# Altium PCB MZCAT_motherboard.PcbDoc (part 4 of 4)
Units mm, origin at the board's own origin, x right, y up, seen from the top; angles counter-clockwise.
Board outline 99.01 x 133.6 mm, 6 copper layers (Top Layer, Ref Top, Layer 2, Layer 3, Ref Bot, Bottom Layer), stack 1.473 mm thick; 289 components, 231 nets, 1176 pads, 492 vias.
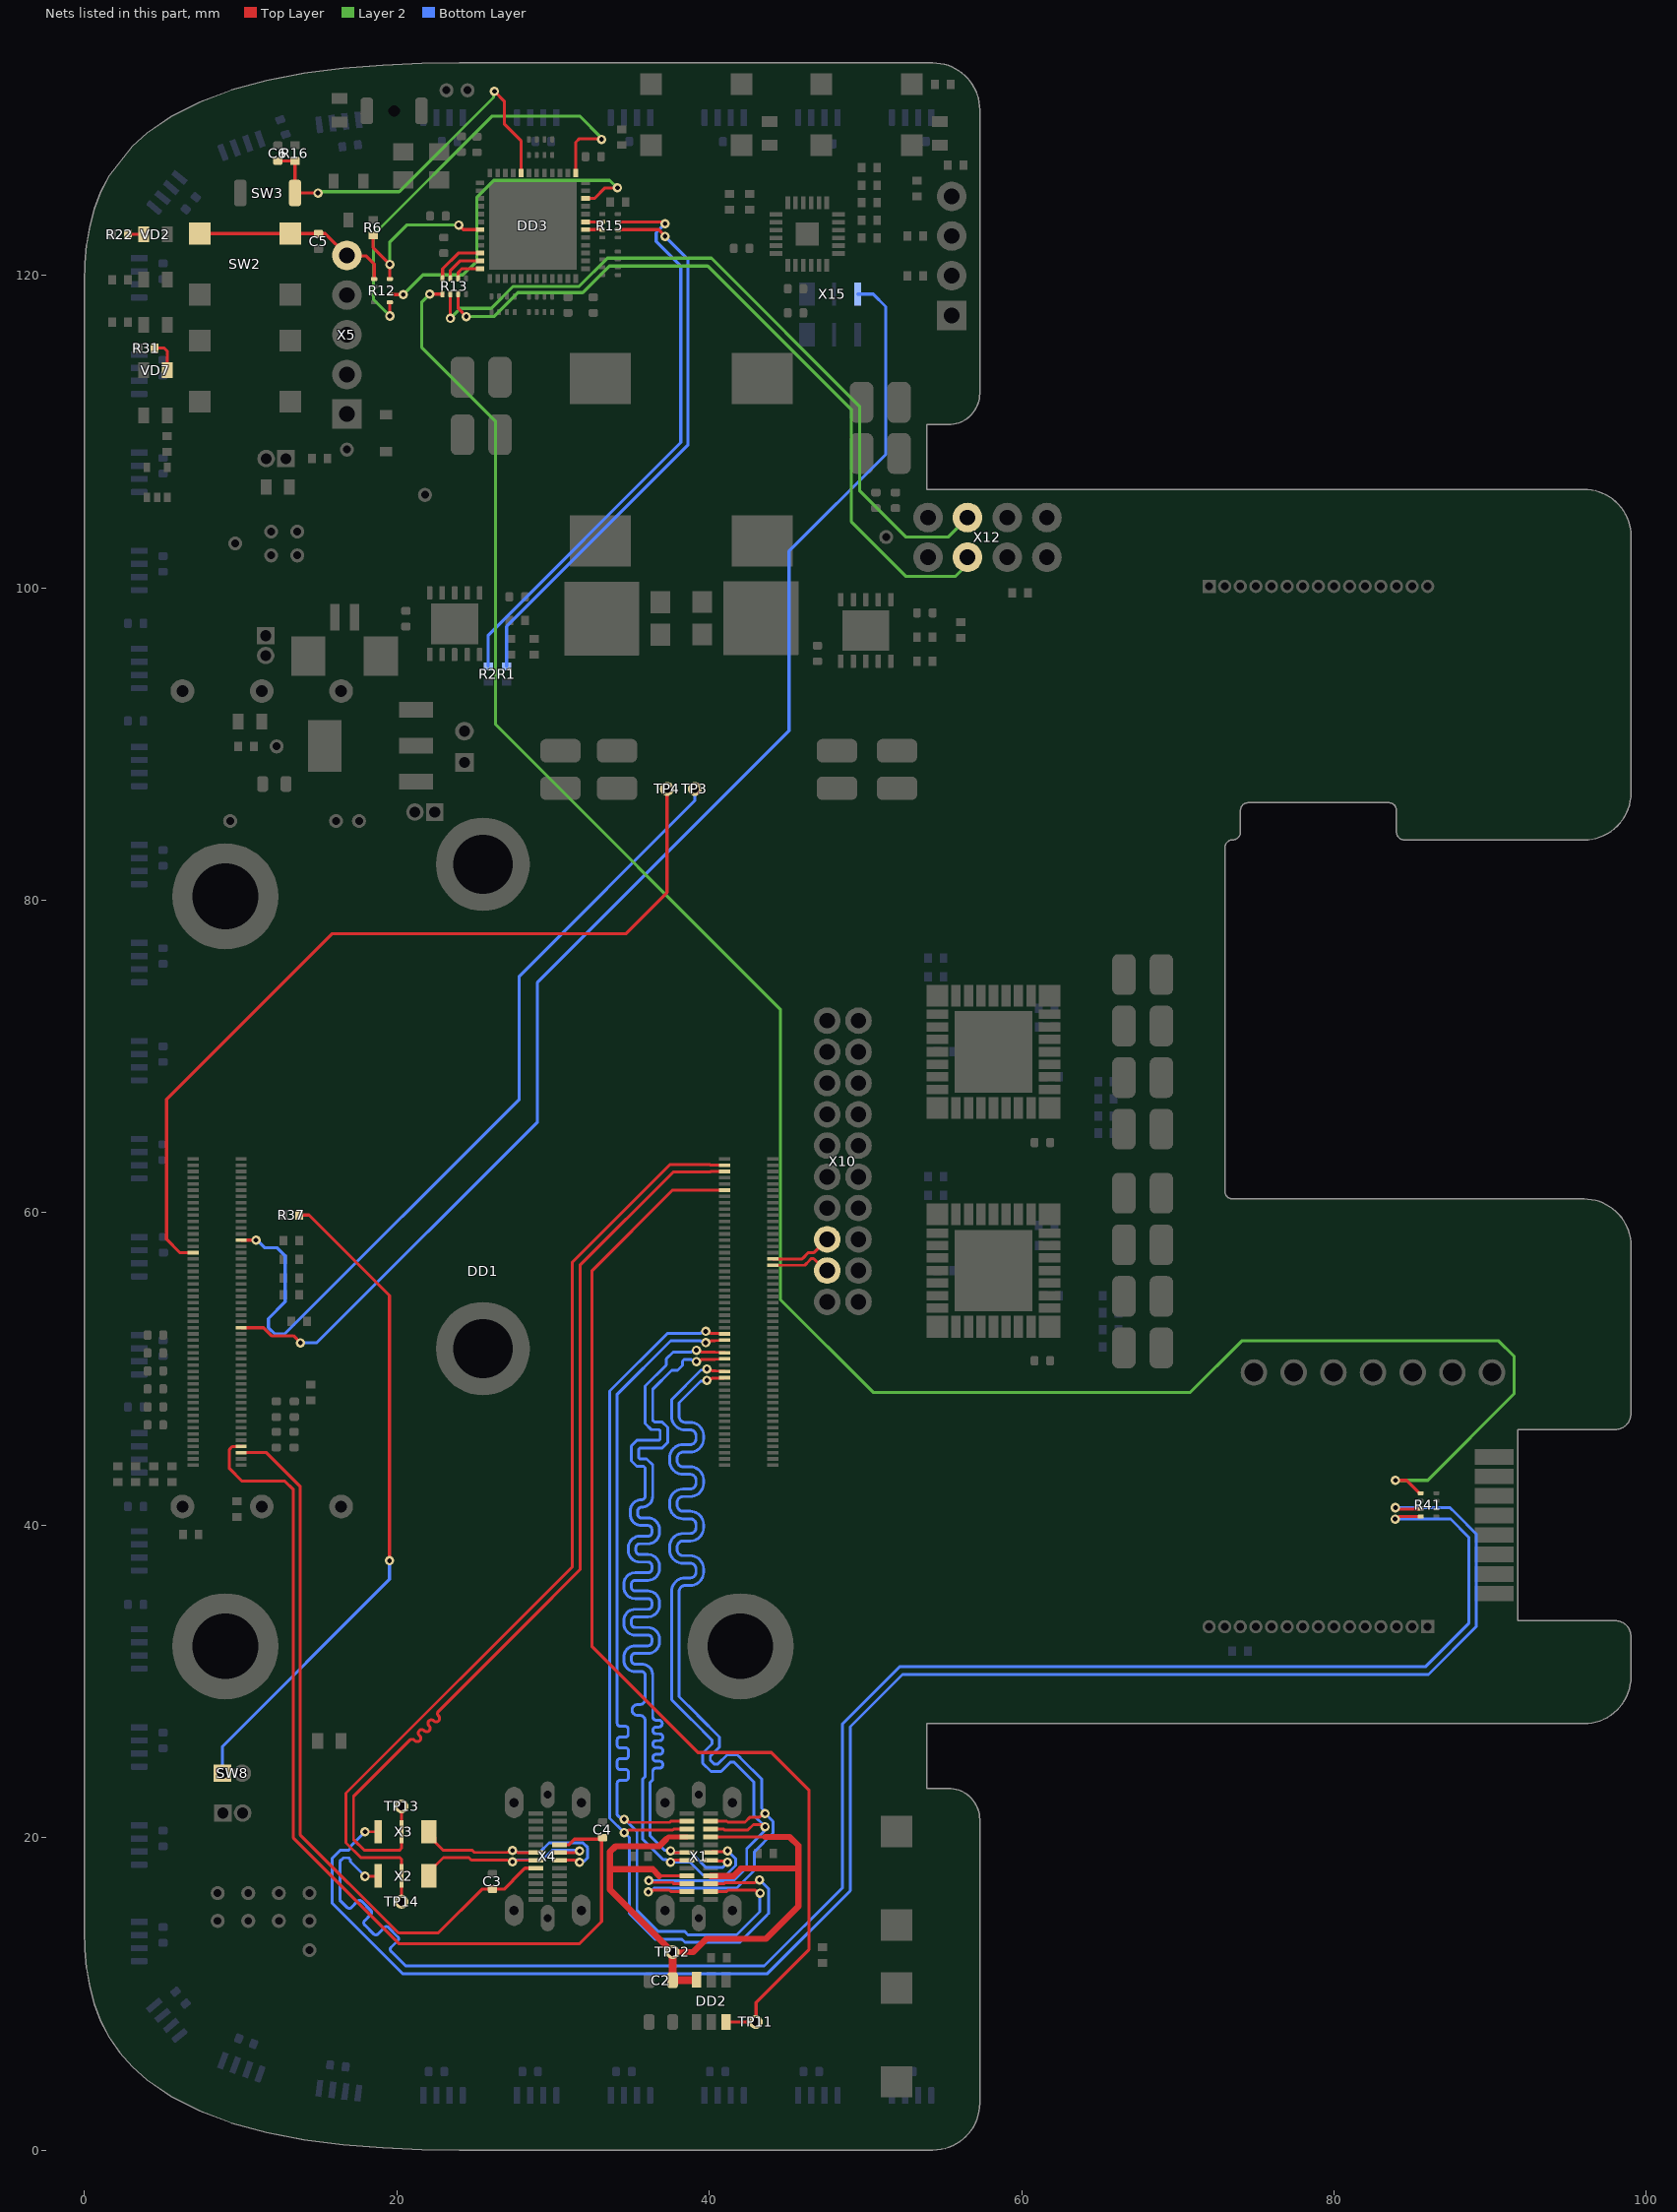
[diagram p8: the nets of this part, all layers, seen from the top]

## Via types
v1: diameter 0.6, hole 0.3, Top Layer to Bottom Layer, tented both sides, 477 vias
v2: diameter 0.6, hole 0.3, Top Layer to Bottom Layer, 15 vias

## Nets (pads, with @x,y where several pads share a name; then routed paths per layer and width w, separated by ;. In a path a pad name is that pad's centre, name@x,y a point inside that pad or via, vN(x,y) a via of type N, cw(c..) or ccw(c..) an arc to the next point about the centre after c; other vN are vias at no path point) (continued)
RPI_I2C1_IMU.SDA: DD1.56 X15.3 | length 88.8
  Top Layer w0.2: DD1.56@10.03,52.643 11.457,52.643 11.975,52.125 13.375,52.125 v1(13.825,51.675)
  Bottom Layer w0.2: v1(13.825,51.675) 14.875,51.675 29,65.8 29,74.745 45.112,90.857 45.112,102.347 51.3,108.535 51.3,118 50.5,118.8 X15.3@49.5,118.8
RUN_LED_5: R31.2 VD7.1 | length 2.1
  Top Layer w0.2: R31.2@4.475,115.35 5.1,115.35 5.3,115.15 VD7.1@5.3,113.925
RX4_SCL3_GPIO12_3: DD1.28 TP3.1 | length 55.3
  Top Layer w0.2: DD1.28@10.03,58.243 10.034,58.246 10.971,58.246 v2(10.975,58.25)
  Bottom Layer w0.2: v2(10.975,58.25) 11.051,58.25 11.551,57.75 12.35,57.75 12.85,57.25 12.85,54.3 11.775,53.225 11.775,52.65 12.2,52.225 12.8,52.225 27.835,67.26 27.835,75.134 39.075,86.374 TP3.1@39.075,87.125
SERVO_LiDAR.SERVO_X: R13.3 X12.3 | length 47.3
  Top Layer w0.2: v1(23.425,117.25) R13.3@23.425,118.798
  Layer 2 w0.2: v1(23.425,117.25) 24.063,117.888 26.038,117.888 27.45,119.3 31.675,119.3 33.475,121.1 40.15,121.1 49.625,111.625 49.625,106.225 52.6,103.25 55.29,103.25 X12.3@56.54,104.5
SERVO_LiDAR.SERVO_Y: R13.5 X12.4 | length 48.3
  Top Layer w0.2: R13.5@23.925,118.798 23.925,117.883 v1(24.445,117.363)
  Layer 2 w0.2: v1(24.445,117.363) 26.213,117.363 27.75,118.9 31.9,118.9 33.6,120.6 39.9,120.6 49.1,111.4 49.1,104.225 52.6,100.725 55.74,100.725 56.54,101.525 X12.4@56.54,101.96
SERVO_VYD: R13.1 R41.8 | length 140.3
  Top Layer w0.2: v1(22.1,118.798) R13.1@22.925,118.798 ; v1(83.939,42.875) 84.65,42.875 85.475,42.05 R41.8@85.55,42.05
  Layer 2 w0.2: v1(22.1,118.798) 21.6,118.298 21.6,115.375 26.325,110.65 26.325,91.25 44.55,73.025 44.55,54.45 50.5,48.5 70.8,48.5 74.1,51.8 90.55,51.8 91.525,50.825 91.525,48.4 86,42.875 v1(83.939,42.875)
SERVO_VYD_4: DD3.10 R13.2 | length 3.4
  Top Layer w0.2: R13.2@22.925,119.8 22.925,120.425 23.925,121.425 DD3.10@25.325,121.425
SERVO_X_4: DD3.11 R13.4 | length 2.7
  Top Layer w0.2: R13.4@23.425,119.8 23.425,120.324 24.026,120.925 DD3.11@25.325,120.925
SERVO_Y_4: DD3.12 R13.6 | length 1.9
  Top Layer w0.2: R13.6@23.925,119.8 23.925,120.2 24.15,120.425 DD3.12@25.325,120.425
STM32_BOOT_4: DD3.44 R16.2 SW3.2 С6.2 | length 24.9
  Top Layer w0.2: С6.2@12.375,127.325 R16.2@13.475,127.325 SW3.2@13.475,125.521 ; SW3.2@13.475,125.275 SW3.2@13.475,125.521 ; v1(14.95,125.275) 13.721,125.275 SW3.2@13.475,125.521 ; v1(26.25,131.775) 26.875,131.15 26.875,129.7 27.95,128.625 DD3.44@27.95,126.55
  Layer 2 w0.2: v1@14.902,125.35 20.15,125.35 26.188,131.388 26.188,131.713 v1(26.25,131.775)
STM32_PWR_LED_4: R22.1 VD2.2 | length 1
  Top Layer w0.2: R22.1@2.775,122.625 VD2.2@3.8,122.625
STM32_RESET: DD3.7 R6.1 R12.2 | length 11
  Top Layer w0.2: R6.1@18.475,122.55 18.475,121.775 v1(19.55,120.7) R12.2@19.55,119.775 ; v1(23.956,123.225) 24.256,122.925 DD3.7@25.325,122.925
  Layer 2 w0.2: v1(19.55,120.7) 19.55,122.15 20.625,123.225 v1(23.956,123.225)
STM32_RST_4: R12.1 SW2.2 X5.5 С5.2 | length 12.9
  Top Layer w0.2: SW2.2@7.375,122.675 SW2.2@13.175,122.675 С5.2@14.975,122.675 15.405,122.675 X5.5@16.8,121.28 16.829,121.251 18.024,121.251 18.548,120.727 R12.1@18.548,119.775
SWCLK_4: DD3.37 R12.8 | length 28.7
  Top Layer w0.2: v1(19.55,117.4) R12.8@19.55,118.275 ; DD3.37@31.45,126.55 31.45,128.524 31.676,128.75 33.058,128.75 v1(33.104,128.704)
  Layer 2 w0.2: v1(19.55,117.4) 18.5,118.45 18.5,122.6 26.1,130.2 31.7,130.2 33.104,128.796 v1(33.104,128.704)
SWIDIO_4: DD3.34 R12.6 | length 22.5
  Top Layer w0.2: R12.6@19.55,118.775 19.553,118.772 20.403,118.772 v1(20.407,118.768) ; DD3.34@32.075,124.925 32.65,124.925 33.325,125.6 v1(34.125,125.6)
  Layer 2 w0.2: v1(20.407,118.768) 21.669,120.031 24.231,120.031 25.125,120.925 25.125,125 26.2,126.075 33.628,126.075 34.103,125.6 v1(34.125,125.6)
TX4_SDA3_GPIO12_3: DD1.31 TP4.1 | length 55.2
  Top Layer w0.2: DD1.31@6.95,57.443 6.107,57.443 5.25,58.3 5.25,67.262 15.838,77.85 34.65,77.85 37.3,80.5 TP4.1@37.3,87.125
TYPEC_D_2_N: DD1.165 X1.7 X1.18 | length 60.5
  Top Layer w0.184: v1(37.525,19.163) 37.645,19.042 38.567,19.042 X1.18@38.575,19.05 ; v1(39.175,50.48) 39.255,50.559 39.45,50.559 39.491,50.6 39.952,50.6 40.35,50.6 ; X1.7@40.085,18.55 40.143,18.492 41.114,18.492 v1(41.172,18.434) ; 40.39,50.62 40.965,50.62 DD1.165@40.988,50.643
  Bottom Layer w0.184: v1@37.525,19.042 38.843,19.042 39.785,18.1 40.859,18.1 41.172,18.413 v1(41.172,18.434) ; v1(37.525,19.163) 37.445,19.083 37.445,19.096 37.333,19.209 37.124,19.209 36.209,20.124 36.209,23.53 36.384,23.705 36.384,24.235 cw(c36.603,24.235) 36.603,24.454 36.813,24.454 ccw(c36.813,24.673) 36.813,24.892 36.603,24.892 cw(c36.603,25.111) 36.603,25.33 36.813,25.33 ccw(c36.813,25.55) 36.813,25.769 36.603,25.769 cw(c36.603,25.988) 36.603,26.207 36.813,26.207 ccw(c36.813,26.426) 36.813,26.645 36.603,26.645 cw(c36.603,26.864) 36.603,27.083 36.769,27.083 ccw(c36.769,27.302) 36.769,27.521 36.603,27.521 cw(c36.603,27.74) 36.384,27.74 36.384,28.771 36.384,30.391 ccw(c35.661,30.391) 35.661,31.115 35.254,31.115 cw(c35.254,31.354) 35.014,31.354 35.014,31.559 cw(c35.254,31.559) 35.254,31.799 36.084,31.799 ccw(c36.084,32.523) 36.807,32.523 36.807,32.728 ccw(c36.084,32.728) 36.084,33.451 35.254,33.451 cw(c35.254,33.691) 35.014,33.691 35.014,33.896 cw(c35.254,33.896) 35.254,34.136 36.084,34.136 ccw(c36.084,34.859) 36.807,34.859 36.807,35.064 ccw(c36.084,35.064) 36.084,35.788 35.254,35.788 cw(c35.254,36.028) 35.014,36.028 35.014,36.233 cw(c35.254,36.233) 35.254,36.472 36.084,36.472 ccw(c36.084,37.196) 36.807,37.196 36.807,37.401 ccw(c36.084,37.401) 36.084,38.125 35.547,38.125 cw(c35.547,38.364) 35.307,38.364 35.307,38.569 cw(c35.547,38.569) 35.547,38.809 36.084,38.809 ccw(c36.084,39.533) 36.807,39.533 36.807,39.738 ccw(c36.084,39.738) 36.084,40.461 35.661,40.461 cw(c35.661,40.701) 35.421,40.701 35.421,40.906 cw(c35.661,40.906) 35.661,41.146 ccw(c35.661,41.869) 36.384,41.869 36.384,42.879 36.384,43.859 35.993,44.251 35.56,44.251 35.491,44.32 35.491,44.874 35.56,44.943 36.984,44.943 37.337,45.296 37.337,46.251 36.984,46.603 36.492,46.603 36.384,46.711 36.384,46.945 36.384,48.699 37.602,49.917 37.98,49.917 38.283,50.22 38.283,50.492 38.391,50.6 38.859,50.6 38.9,50.559 39.095,50.559 v1(39.175,50.48)
TYPEC_D_2_P: DD1.163 X1.6 X1.19 | length 61.5
  Top Layer w0.184: v1(37.525,18.438) 37.645,18.558 38.567,18.558 X1.19@38.575,18.55 ; v1(39.175,51.205) 39.255,51.125 39.45,51.125 39.491,51.084 39.751,51.084 40.35,51.084 40.369,51.065 40.965,51.065 DD1.163@40.988,51.043 ; X1.6@40.085,19.05 40.141,19.106 41.119,19.106 v1(41.175,19.163)
  Bottom Layer w0.184: v1(39.175,51.205) 39.095,51.125 38.9,51.125 38.859,51.084 37.684,51.084 37.249,50.649 37.249,50.249 35.9,48.9 35.9,46.945 35.9,46.511 36.292,46.119 36.784,46.119 36.853,46.05 36.853,45.496 36.784,45.427 35.359,45.427 35.006,45.074 35.006,44.119 35.359,43.767 35.792,43.767 35.9,43.659 35.9,42.879 35.9,42.779 35.9,41.869 cw(c35.661,41.869) 35.661,41.63 ccw(c35.661,40.906) 34.937,40.906 34.937,40.701 ccw(c35.661,40.701) 35.661,39.977 36.084,39.977 cw(c36.084,39.738) 36.323,39.738 36.323,39.533 cw(c36.084,39.533) 36.084,39.293 35.547,39.293 ccw(c35.547,38.569) 34.823,38.569 34.823,38.364 ccw(c35.547,38.364) 35.547,37.641 36.084,37.641 cw(c36.084,37.401) 36.323,37.401 36.323,37.196 cw(c36.084,37.196) 36.084,36.956 35.254,36.956 ccw(c35.254,36.233) 34.53,36.233 34.53,36.028 ccw(c35.254,36.028) 35.254,35.304 36.084,35.304 cw(c36.084,35.064) 36.323,35.064 36.323,34.859 cw(c36.084,34.859) 36.084,34.62 35.254,34.62 ccw(c35.254,33.896) 34.53,33.896 34.53,33.691 ccw(c35.254,33.691) 35.254,32.967 36.084,32.967 cw(c36.084,32.728) 36.323,32.728 36.323,32.523 cw(c36.084,32.523) 36.084,32.283 35.254,32.283 ccw(c35.254,31.559) 34.53,31.559 34.53,31.354 ccw(c35.254,31.354) 35.254,30.631 35.661,30.631 cw(c35.661,30.391) 35.9,30.391 35.9,30.057 35.9,29.9 35.9,28.865 cw(c35.554,28.865) 35.554,28.519 35.404,28.519 ccw(c35.404,28.173) 35.404,27.827 35.554,27.827 cw(c35.554,27.481) 35.9,27.481 35.9,27.389 35.9,23.905 35.725,23.73 35.725,19.923 37.049,18.599 37.251,18.599 37.412,18.438 38.762,18.438 39.584,17.616 41.085,17.616 41.689,18.22 41.689,18.649 v1(41.175,19.163)
TYPEC_RX_2_N: DD1.157 X1.10 X1.15 | length 63.2
  Top Layer w0.184: v1(34.55,20.325) 34.663,20.325 34.828,20.49 37.669,20.49 37.737,20.558 38.567,20.558 X1.15@38.575,20.55 ; v1(39.775,52.405) 39.855,52.325 40.05,52.325 40.091,52.284 40.375,52.284 40.394,52.265 40.965,52.265 DD1.157@40.988,52.243 ; X1.10@40.085,17.05 40.093,17.042 40.923,17.042 40.998,17.117 42.93,17.117 43.112,17.3 v1(43.225,17.3)
  Bottom Layer w0.184: v1(34.55,20.325) 33.625,21.25 33.625,48.585 37.324,52.284 39.459,52.284 39.5,52.325 39.695,52.325 v1(39.775,52.405) ; v1@34.606,20.381 34.606,20.294 34.891,20.009 34.891,15.149 36.54,13.5 38.24,13.5 38.442,13.299 41.958,13.299 43.715,15.055 43.715,15.063 43.8,15.148 43.8,16.725 v1(43.225,17.3)
TYPEC_RX_2_P: DD1.159 X1.11 X1.14 | length 63.1
  Top Layer w0.184: v1(34.55,21.175) 34.663,21.175 34.863,20.974 37.469,20.974 37.536,21.042 38.567,21.042 X1.14@38.575,21.05 ; v1(39.775,51.68) 39.855,51.759 40.05,51.759 40.091,51.8 40.375,51.8 ; X1.11@40.085,16.55 40.093,16.558 41.124,16.558 41.199,16.633 42.962,16.633 43.145,16.45 v1(43.258,16.45) ; 40.415,51.82 40.965,51.82 DD1.159@40.988,51.843
  Bottom Layer w0.184: v1(39.775,51.68) 39.695,51.759 39.5,51.759 39.459,51.8 37.525,51.8 34.109,48.384 34.109,27.691 34.109,27.313 ccw(c34.293,27.313) 34.293,27.129 34.635,27.129 cw(c34.635,26.956) 34.808,26.956 34.808,26.61 cw(c34.635,26.61) 34.635,26.437 34.282,26.437 ccw(c34.282,26.264) 34.109,26.264 34.109,25.918 ccw(c34.282,25.918) 34.282,25.745 34.647,25.745 cw(c34.647,25.572) 34.82,25.572 34.82,25.226 cw(c34.647,25.226) 34.647,25.053 34.282,25.053 ccw(c34.282,24.88) 34.109,24.88 34.109,24.534 ccw(c34.282,24.534) 34.282,24.361 34.647,24.361 cw(c34.647,24.188) 34.82,24.188 34.82,23.841 cw(c34.647,23.841) 34.647,23.668 34.293,23.668 ccw(c34.293,23.484) 34.109,23.484 34.109,22.7 34.109,21.451 34.244,21.316 34.297,21.316 34.358,21.255 34.506,21.255 35.375,20.386 35.375,15.35 36.741,13.984 38.441,13.984 38.642,13.783 41.758,13.783 43.231,15.256 43.231,16.423 v1(43.258,16.45)
TYPEC_TX_2_N: DD1.169 X1.3 X1.22 | length 61.3
  Top Layer w0.184: v1(36.124,17.25) 36.204,17.17 36.399,17.17 36.44,17.129 37.649,17.129 37.737,17.042 38.567,17.042 X1.22@38.575,17.05 ; v1(39.85,50.005) 39.93,49.925 40.125,49.925 40.166,49.884 40.4,49.884 40.419,49.865 40.965,49.865 DD1.169@40.988,49.843 ; X1.3@40.085,20.55 40.093,20.558 40.923,20.558 40.982,20.499 42.483,20.499 42.818,20.833 43.33,20.833 43.462,20.7 v1(43.575,20.7)
  Bottom Layer w0.184: v1(36.124,17.25) 41.55,17.25 42.4,18.1 42.4,19.284 43.495,20.379 43.495,20.62 v1(43.575,20.7) 42.869,21.406 42.869,23.546 41.758,24.658 41.592,24.823 41.348,24.823 40.759,24.234 40.113,24.234 39.585,24.763 39.585,25.408 40.173,25.997 40.173,26.242 38.973,27.442 38.808,27.608 37.591,28.824 37.591,33.346 37.591,35.768 cw(c38.45,35.768) 38.45,36.627 38.78,36.627 ccw(c38.78,37.002) 39.155,37.002 39.155,37.19 ccw(c38.78,37.19) 38.78,37.565 38.322,37.565 cw(c38.322,38.425) 37.462,38.425 37.462,38.612 cw(c38.322,38.612) 38.322,39.472 38.78,39.472 ccw(c38.78,39.847) 39.155,39.847 39.155,40.035 ccw(c38.78,40.035) 38.78,40.41 38.322,40.41 cw(c38.322,41.269) 37.462,41.269 37.462,41.457 cw(c38.322,41.457) 38.322,42.316 38.78,42.316 ccw(c38.78,42.692) 39.155,42.692 39.155,42.879 ccw(c38.78,42.879) 38.78,43.255 38.322,43.255 cw(c38.322,44.114) 37.462,44.114 37.462,44.302 cw(c38.322,44.302) 38.322,45.161 38.78,45.161 ccw(c38.78,45.536) 39.155,45.536 39.155,45.724 ccw(c38.78,45.724) 38.78,46.099 38.45,46.099 cw(c38.45,46.959) 37.591,46.959 37.591,47.293 37.591,48.039 39.461,49.909 39.48,49.928 39.774,49.928 v1(39.85,50.005)
TYPEC_TX_2_P: DD1.171 X1.2 X1.23 | length 61.4
  Top Layer w0.184: v1(36.1,16.525) 36.18,16.605 36.375,16.605 36.416,16.645 37.449,16.645 37.536,16.558 38.567,16.558 X1.23@38.575,16.55 ; v1(39.85,49.28) 39.93,49.359 40.125,49.359 40.166,49.4 40.4,49.4 ; X1.2@40.085,21.05 40.093,21.042 41.124,21.042 41.183,20.983 42.283,20.983 42.617,21.317 43.23,21.317 43.462,21.55 v1(43.575,21.55) ; 40.44,49.42 40.965,49.42 DD1.171@40.988,49.443
  Bottom Layer w0.184: v1(36.1,16.525) 36.213,16.525 36.453,16.765 41.75,16.765 42.884,17.899 42.884,19.083 44.092,20.291 44.092,21.033 v1(43.575,21.55) 43.575,21.644 43.353,21.866 43.353,23.747 42.1,25 41.935,25.165 41.793,25.307 41.147,25.307 40.558,24.718 40.313,24.718 40.069,24.963 40.069,25.208 40.658,25.797 40.658,26.442 39.315,27.785 39.15,27.95 38.075,29.025 38.075,33.346 38.075,35.768 cw(c38.45,35.768) 38.45,36.143 38.78,36.143 ccw(c38.78,37.002) 39.639,37.002 39.639,37.19 ccw(c38.78,37.19) 38.78,38.049 38.322,38.049 cw(c38.322,38.425) 37.946,38.425 37.946,38.612 cw(c38.322,38.612) 38.322,38.988 38.78,38.988 ccw(c38.78,39.847) 39.639,39.847 39.639,40.035 ccw(c38.78,40.035) 38.78,40.894 38.322,40.894 cw(c38.322,41.269) 37.946,41.269 37.946,41.457 cw(c38.322,41.457) 38.322,41.832 38.78,41.832 ccw(c38.78,42.692) 39.639,42.692 39.639,42.879 ccw(c38.78,42.879) 38.78,43.739 38.322,43.739 cw(c38.322,44.114) 37.946,44.114 37.946,44.302 cw(c38.322,44.302) 38.322,44.677 38.78,44.677 ccw(c38.78,45.536) 39.639,45.536 39.639,45.724 ccw(c38.78,45.724) 38.78,46.583 38.45,46.583 cw(c38.45,46.959) 38.075,46.959 38.075,47.293 38.075,47.839 39.46,49.223 39.794,49.223 v1(39.85,49.28)
UART2_STM32.RX: R2.1 R15.5 | length 37.4
  Top Layer w0.2: R15.5@34.152,123.425 36.942,123.425 37.067,123.3 v1(37.175,123.3)
  Bottom Layer w0.2: R2.1@25.85,94.975 25.85,96.975 38.175,109.3 38.175,120.6 36.6,122.175 36.6,122.725 v1(37.175,123.3)
UART2_STM32.TX: R1.1 R15.3 | length 36.1
  Top Layer w0.2: R15.3@34.152,122.925 36.75,122.925 v1(37.175,122.5)
  Bottom Layer w0.2: R1.1@27.025,94.975 27.025,97.525 38.625,109.125 38.625,121.05 v1(37.175,122.5)
USART1_RX_4: DD3.31 R15.6 | length 1.1
  Top Layer w0.2: DD3.31@32.075,123.425 R15.6@33.15,123.425
USART1_TX_4: DD3.30 R15.4 | length 1.1
  Top Layer w0.2: DD3.30@32.075,122.925 R15.4@33.15,122.925
USB2.0.USB_D_N: R41.2 X2.3 | length 110.5
  Top Layer w0.184: v1(17.962,17.525) 18.775,17.525 X2.3@18.8,17.55 ; v1(83.911,40.396) 84.023,40.396 84.177,40.55 R41.2@85.55,40.55
  Bottom Layer w0.184: v1(17.962,17.525) 17.025,18.463 17.025,18.6 16.917,18.708 16.575,18.708 16.35,18.483 16.35,16.056 16.35,16 16.823,15.527 ccw(c16.953,15.657) 17.084,15.527 17.485,15.928 cw(c17.612,15.801) 17.739,15.928 18.333,15.334 cw(c18.206,15.207) 18.333,15.079 17.929,14.675 ccw(c18.057,14.548) 17.929,14.421 18.523,13.827 ccw(c18.651,13.954) 18.778,13.827 19.205,14.253 cw(c19.332,14.126) 19.459,14.253 20.053,13.659 cw(c19.926,13.532) 20.053,13.405 19.63,12.981 ccw(c19.76,12.851) 19.63,12.72 20.543,11.807 20.566,11.784 43.524,11.784 48.541,16.801 48.541,27.301 52.174,30.934 85.849,30.934 88.625,33.71 88.625,39.24 87.469,40.396 v1(83.911,40.396)
USB2.0.USB_D_P: R41.4 X3.3 | length 110.5
  Top Layer w0.184: v1(17.962,20.375) X3.3@18.8,20.375 ; v1(83.932,41.124) 84.045,41.124 84.135,41.034 85.534,41.034 R41.4@85.55,41.05
  Bottom Layer w0.184: v1(17.962,20.375) 17.025,19.438 17.025,19.3 16.917,19.192 16.374,19.192 15.866,18.683 15.866,15.799 20.365,11.3 28.15,11.3 28.625,11.3 34.943,11.3 43.725,11.3 49.025,16.6 49.025,27.1 52.375,30.45 86.05,30.45 89.109,33.509 89.109,39.441 87.811,40.739 87.426,41.124 v1(83.932,41.124)
USB2.0_2_N: DD1.105 TP13.1 X3.2 | length 62.2
  Top Layer w0.184: TP13.1@20.3,22 X3.2@20.3,20.375 20.3,19.312 20.192,19.205 17.895,19.205 17.225,19.875 17.225,22.65 20.438,25.863 20.812,26.237 cw(c20.967,26.083) 21.122,26.237 21.153,26.207 ccw(c21.308,26.362) 21.463,26.207 ccw(c21.308,26.362) 21.463,26.517 21.432,26.547 cw(c21.587,26.702) 21.432,26.857 cw(c21.587,26.702) 21.742,26.857 21.757,26.842 ccw(c21.912,26.997) 22.067,26.842 ccw(c21.912,26.997) 22.067,27.152 22.052,27.167 cw(c22.207,27.322) 22.052,27.477 cw(c22.207,27.322) 22.362,27.477 ccw(c22.517,27.632) 22.671,27.477 ccw(c22.517,27.632) 22.671,27.787 cw(c22.826,27.942) 22.671,28.096 28.187,33.612 31.725,37.15 31.725,56.641 37.684,62.6 40.05,62.6 40.093,62.643 DD1.105@40.988,62.643
USB2.0_2_P: DD1.103 TP14.1 X2.2 | length 62.2
  Top Layer w0.184: TP14.1@20.3,15.9 X2.2@20.3,17.55 20.3,18.613 20.192,18.72 17.695,18.72 16.741,19.674 16.741,22.851 31.241,37.351 31.241,56.841 37.484,63.084 40.05,63.084 40.092,63.043 DD1.103@40.988,63.043
USB2.0_CAM.USB_D_N: DD1.136 X10.18 | length 4
  Top Layer w0.184: DD1.136@44.068,56.643 46.113,56.643 46.418,56.948 46.418,56.949 46.526,57.057 46.678,57.057 47.147,56.588 47.263,56.588 X10.18@47.553,56.298
USB2.0_CAM.USB_D_P: DD1.134 X10.16 | length 4
  Top Layer w0.184: DD1.134@44.068,57.043 45.947,57.043 45.988,57.084 45.988,57.085 46.36,57.457 46.712,57.457 X10.16@47.553,58.298
USB2.0_CC1_2: DD1.94 X4.5 С4.2 | length 60.3
  Top Layer w0.2: DD1.94@10.03,45.043 10.016,45.028 9.453,45.028 9.275,44.85 9.275,43.625 10.075,42.825 12.825,42.825 13.375,42.275 13.375,19.975 20.15,13.2 31.675,13.2 33.1,14.625 33.1,19.9 31.375,19.9 31.025,19.55 X4.5@30.41,19.55
USB2.0_CC2_2: DD1.96 X4.20 С3.2 | length 46.4
  Top Layer w0.2: DD1.96@10.03,44.643 11.657,44.643 13.8,42.5 13.8,20.2 20.1,13.9 22.65,13.9 25.45,16.7 С3.2@26.125,16.7 26.875,16.7 27.4,17.225 27.4,17.25 28.2,18.05 X4.20@28.9,18.05
USB2.0_D_2_N: X3.1 X4.7 X4.18 | length 15.5
  Top Layer w0.184: X3.1@22.05,20.375 22.458,19.967 22.458,19.692 22.945,19.205 24.812,19.205 24.962,19.055 27.084,19.055 27.125,19.095 27.32,19.095 v1(27.4,19.175) 27.48,19.095 27.675,19.095 27.728,19.042 28.892,19.042 X4.18@28.9,19.05 ; X4.7@30.41,18.55 30.418,18.558 31.372,18.558 31.425,18.505 31.62,18.505 v1(31.7,18.425)
  Bottom Layer w0.184: v1(27.4,19.175) 27.52,19.055 29.133,19.055 29.745,19.667 31.914,19.667 32.217,19.364 32.217,18.717 32.005,18.505 31.78,18.505 v1(31.7,18.425)
USB2.0_D_2_P: X2.1 X4.6 X4.19 | length 13.6
  Top Layer w0.184: X2.1@22.05,17.55 22.05,17.8 22.97,18.72 24.612,18.72 24.762,18.57 27.084,18.57 27.125,18.53 27.32,18.53 v1(27.4,18.45) 27.513,18.45 27.613,18.55 X4.19@28.9,18.55 ; X4.6@30.41,19.05 30.418,19.042 31.384,19.042 31.413,19.07 31.62,19.07 v1(31.7,19.15)
  Bottom Layer w0.184: v1(27.4,18.45) 27.52,18.57 27.9,18.57 29.334,18.57 29.595,18.832 29.946,19.183 31.667,19.183 v1(31.7,19.15)
VBUS_EN_2: DD1.111 DD2.3 TP11.1 | length 70.5
  Top Layer w0.2: DD1.111@40.988,61.443 37.643,61.443 32.5,56.3 32.5,32.225 39.275,25.45 43.975,25.45 46.375,23.05 46.375,12.825 43,9.45 43,8.225 TP11.1@42.975,8.2 DD2.3@41.075,8.2
VBUS_TYPEC: DD2.6 TP12.1 X1.4 X1.9 X1.16 X1.21 С2.2 | length 46.6
  Top Layer w0.2: 36.8,17.55 X1.21@38.575,17.55 ; X1.4@40.085,20.05 43.6,20.05
  Top Layer w0.3: 37.25,19.908 37.392,20.05 X1.16@38.575,20.05
  Top Layer w0.4: 36.8,17.55 36.375,17.975 33.675,17.975 33.65,18 ; 37.25,19.908 36.792,19.45 34,19.45 33.65,19.1 33.65,18 ; DD2.6@39.15,10.875 DD2.6@39.175,10.9 ; X1.9@40.085,17.55 41.55,17.55 41.678,17.678 42.025,18.025 45.7,18.025 45.7,15.6 ; 43.6,20.05 45.15,20.05 45.7,19.5 45.7,18.065 ; 45.672,15.572 43.625,13.525 39.825,13.525 38.975,12.675 TP12.1@37.65,12.675 33.65,16.675 33.65,18
  Top Layer w0.5: TP12.1@37.65,12.675 С2.2@37.65,10.875 DD2.6@39.15,10.875
WRITING_EEPROM_5: R37.2 SW8.1 | length 42.9
  Top Layer w0.2: R37.2@13.75,59.85 14.375,59.85 19.525,54.7 v1(19.525,37.725)
  Bottom Layer w0.2: SW8.1@8.83,24.125 8.83,25.836 19.525,36.531 v1(19.525,37.725)
pads on no net: DD1. DD1.3 DD1.4 DD1.5 DD1.6 DD1.9 DD1.10 DD1.11 DD1.12 DD1.15 DD1.16 DD1.17 DD1.18 DD1.19 DD1.25 DD1.26 DD1.27 DD1.29 DD1.30 DD1.35 DD1.38 DD1.40 DD1.41 DD1.44 DD1.45 DD1.46 DD1.47 DD1.48 DD1.49 DD1.51 DD1.55 DD1.57 DD1.61 DD1.62 DD1.63 DD1.64 DD1.67 DD1.68 DD1.69 DD1.70 DD1.72 DD1.73 DD1.75 DD1.76 DD1.99 DD1.101 DD1.102 DD1.104 DD1.106 DD1.109 DD1.110 DD1.112 DD1.116 DD1.118 DD1.122 DD1.124 DD1.128 DD1.130 DD1.133 DD1.135 DD1.139 DD1.140 DD1.141 DD1.142 DD1.143 DD1.145 DD1.146 DD1.147 DD1.148 DD1.149 DD1.151 DD1.152 DD1.153 DD1.154 DD1.158 DD1.160 DD1.164 DD1.166 DD1.170 DD1.172 DD1.176 DD1.178 DD1.182 DD1.184 DD1.188 DD1.190 DD1.193 DD1.194 DD1.195 DD1.196 DD1.199 DD1.200 DD2.4 DD3.2 DD3.3 DD3.4 DD5.8 DD6.8 DD7.1 DD8.9 DD8.17 DD8.25 DD9.9 DD9.17 DD9.25 DD10.2 DD10.3 DD10.4 DD10.5 DD10.6 DD10.7 DD10.14 DD10.15 DD10.16 DD10.17 DD10.19 DD10.21 HL35.3 R12.3 R12.4 SW3. SW10.2 SW11.2 SW14. X1.8 X1.17 X4.2 X4.3 X4.8 X4.10 X4.11 X4.14 X4.15 X4.17 X4.22 X4.23 X6.0 X9.12 XT1.2 XT1.4
copper on no net:
  other v2: 46.275,122.65

## Polygon pours and split planes (outlines as drawn)
GND on Top Layer "TOP_GND" (solid, remove dead copper, pour order 28): 2.25,6.247 1.579,7.227 1.04,8.265 0.626,9.353 0.626,9.354 0.328,10.483 0.134,11.646 0.03,12.83 0.03,12.831 0,14.024 0,119.552 0.03,120.745 0.03,120.746 0.134,121.929 0.134,121.93 0.328,123.092 0.328,123.093 0.626,124.222 0.626,124.224 1.04,125.311 1.579,126.349 2.25,127.329 3.054,128.244 3.057,128.247 3.997,129.092 5.551,130.159 5.552,130.16 7.361,131.075 7.362,131.076 9.403,131.837 14.044,132.908 14.045,132.908 16.546,133.235 16.548,133.235 19.089,133.441 21.599,133.547 21.6,133.547 23.993,133.576 54.303,133.576 cw(c54.303,130.583) 57.297,130.583 57.297,112.438 cw(c55.303,112.438) 56.798,111.119 cw(c55.303,112.438) 55.303,110.445 53.898,110.445 53.892,110.438 53.892,106.288 53.898,106.281 95.993,106.281 cw(c95.993,103.288) 98.987,103.288 98.987,86.857 cw(c95.993,86.857) 95.993,83.863 84.493,83.863 cw(c84.493,84.357) 84,84.357 84,85.739 ccw(c83.493,85.739) 83.493,86.246 74.493,86.246 ccw(c74.493,85.739) 73.987,85.739 73.987,84.357 cw(c73.493,84.357) 73.493,83.863 ccw(c73.493,83.357) 72.987,83.357 72.987,61.366 ccw(c73.493,61.366) 73.493,60.859 95.993,60.859 cw(c95.993,57.866) 98.987,57.866 98.987,30.288 cw(c95.993,30.288) 95.993,27.295 53.898,27.295 53.892,27.288 53.892,23.138 53.898,23.131 55.303,23.131 cw(c55.303,21.138) 56.798,22.457 cw(c55.303,21.138) 57.297,21.138 57.297,2.993 cw(c54.303,2.993) 54.303,0 23.993,0 21.601,0.029 21.599,0.029 19.091,0.135 19.088,0.135 16.548,0.341 16.546,0.341 14.044,0.668 11.646,1.13 11.645,1.13 9.404,1.739 9.403,1.739 7.362,2.5 7.361,2.501 5.552,3.416 5.551,3.416 3.997,4.484 3.058,5.329 3.053,5.333
+5В on Top Layer "+5В_L01_P016" (solid, pour order 16): 91.5,37.6 3283.641,37.725 85.95,37.725 85.95,38.575 86.321,38.946 88.504,38.946 88.8,38.65 91.5,38.65
+5В on Top Layer "+5В_L01_P024" (solid, pour order 24): 19.05,99.25 18.975,99.175 15.525,99.175 14.279,97.929 12.184,97.929 12.184,96.566 12.2,96.55 10.425,94.775 5.925,94.775 5,93.85 5,90.1 6.6,88.5 6.6,43.6 5.8,42.8 0.775,42.8 0,43.575 0,99.775 1.85,101.625 13.9,101.625 16.711,104.436 18.411,104.436 22.25,108.275 25.85,108.275 25.85,114.9 27.05,116.1 35.475,116.1 36.2,115.375 36.2,110.225 34.575,108.6 32.75,108.6 30.3,106.15 25.95,106.15
+7,2В on Top Layer "+7,2В_L01_P021" (solid, pour order 21): 54.5,105.4 54.5,100.35 52.575,100.35 51.4,101.525 49.775,101.525 47,104.3 47,108.725 45.925,109.8 41.15,109.8 40.35,110.6 40.35,115.375 41.075,116.1 47.675,116.1 50.475,113.3 50.475,105.4 50.525,105.35 52.325,105.35 52.375,105.4
+3S on Top Layer "Top Layer-+3S" (solid, remove dead copper, pour order 27): 19.55,93.675 19.55,91.9 19.775,91.675 23.3,91.675 24.575,90.4 24.575,88.825 55.2,88.825 57.725,86.3 57.725,78.025 57.316,77.616 57.316,51.434 62.65,46.1 77.275,46.1 78.9,47.725 78.9,51.625 78.249,52.276 68.416,52.259 67.3,53.375 67.3,83.325 64.625,86 56.15,94.475 51.425,94.475 51.05,94.85 51.05,95.775 49,95.775 49,94.675 48.675,94.35 25.65,94.35 24.9,95.1 24.9,96.225 22.525,96.225 22.525,95.1 20.975,95.1
NetDD6_10 on Top Layer "NETDD6_10_L01_P023" (solid, pour order 23): 36.025,94.55 36.025,105.5 35.575,105.95 26.05,105.95 21,100.9 21,99.175 22.375,99.175 22.375,100.075 23.1,100.8 28.225,100.8 29.4,99.625 29.4,95.25 30.1,94.55
MOTOR2B_OUT on Top Layer "MOTOR2B_OUT_L01_P020" (solid, pour order 20): 56.3,53.396 56.3,51.296 56,50.996 54.5,50.996 52.2,53.296 52.2,54.296 51.3,55.196 46.4,55.196 45.9,54.696 45.9,52.996 50,48.896 57.5,48.896 59.3,50.696 59.3,53.396
GND on Top Layer "GND_L01_P026" (solid, pour order 26): 5.962,121.012 6.713,121.763 13.862,121.763 14.4,121.225 14.4,113.35 13.875,112.825 6.675,112.825 5.962,113.538
+3,3В on Top Layer "+3,3В_L01_P025" (solid, pour order 25): 22.8,88.825 22.8,90.95 19.825,90.95 19.325,91.45 19.325,92.425 13.45,92.425 12.325,91.3 12.325,88.025 13.48,86.87 19.175,86.87 19.175,87.825 20.175,88.825
NetDD5_10 on Top Layer "NETDD5_10_L01_P022" (solid, pour order 22): 48.775,102.25 45.15,105.875 41.1,105.875 40.4,105.175 40.4,100.475 40.4,94.55 45.775,94.55 46.425,95.2 46.425,97.075 48.05,98.7 48.775,98.7
MOTOR2A_OUT on Top Layer "MOTOR2A_OUT_L01_P018" (solid, pour order 18): 56.3,59.2 56.3,61.3 56,61.6 51.6,61.6 51.3,61.3 46.6,61.3 46.3,61.6 46.3,62.9 46.6,63.2 57.6,63.2 59.3,61.5 59.3,59.2
MOTOR1B_OUT on Top Layer "MOTOR1B_OUT_L01_P019" (solid, pour order 19): 56.3,67.396 56.3,65.296 56,64.996 51.6,64.996 51.3,65.296 46.6,65.296 46.3,64.996 46.3,63.696 46.6,63.396 57.6,63.396 59.3,65.096 59.3,67.396
MOTOR1A_OUT on Top Layer "MOTOR1A_OUT_L01_P017" (solid, pour order 17): 56.3,73.2 56.3,75.3 56,75.6 54.5,75.6 52.2,73.3 52.2,72.3 51.3,71.4 46.4,71.4 45.9,71.9 45.9,73.6 50,77.7 57.5,77.7 59.3,75.9 59.3,73.2
+3,3В on Layer 3 "+3,3В_L04_P049" (solid, remove dead copper, pour order 49): 1.047,84.369 1.047,120.847 11.2,131 52.1,131 56.4,126.7 56.4,115 44.138,102.738 44.138,98.212 30.65,84.348 5.5,84.366
+5В on Layer 3 "5V_INNER" (solid, remove dead copper, pour order 48): 30.8,61.9 31.1,62.2 39.6,62.2 46.5,69.1 48.575,69.1 48.575,71.5 4.475,71.5 4.475,120.748 cw(c7.015,120.748) 5.219,122.544 9.206,126.531 cw(c11.002,124.735) 11.002,127.275 53.948,127.275 ccw(c53.948,129.815) 55.744,128.019 56.606,128.881 ccw(c54.81,130.677) 57.35,130.677 57.35,134.35 56.144,135.556 ccw(c54.349,133.762) 54.348,136.3 5.352,136.3 ccw(c5.351,133.761) 3.556,135.556 0,132 0,0 57.35,0 57.35,25.1 24.006,25.1 19.3,28.85 19.3,50.4
+5В on Layer 3 "+5В_L04_P056" (solid, pour order 56): 88.925,37.8 88.925,39.027 88.602,39.35 85.563,39.35 85.15,38.938 85.15,38.575 86.25,37.475 88.6,37.475
GND on Bottom Layer "BOT_GND" (solid, remove dead copper, pour order 58): 2.25,6.247 1.579,7.227 1.04,8.265 0.626,9.353 0.626,9.354 0.328,10.483 0.134,11.646 0.03,12.83 0.03,12.831 0,14.024 0,119.552 0.03,120.745 0.03,120.746 0.134,121.929 0.134,121.93 0.328,123.092 0.328,123.093 0.626,124.222 0.626,124.224 1.04,125.311 1.579,126.349 2.25,127.329 3.054,128.244 3.057,128.247 3.997,129.092 5.551,130.159 5.552,130.16 7.361,131.075 7.362,131.076 9.403,131.837 14.044,132.908 14.045,132.908 16.546,133.235 16.548,133.235 19.089,133.441 21.599,133.547 21.6,133.547 23.993,133.576 54.303,133.576 cw(c54.303,130.583) 57.297,130.583 57.297,112.438 cw(c55.303,112.438) 56.798,111.119 cw(c55.303,112.438) 55.303,110.445 53.898,110.445 53.892,110.438 53.892,106.288 53.898,106.281 95.993,106.281 cw(c95.993,103.288) 98.987,103.288 98.987,86.857 cw(c95.993,86.857) 95.993,83.863 84.493,83.863 cw(c84.493,84.357) 84,84.357 84,85.739 ccw(c83.493,85.739) 83.493,86.246 74.493,86.246 ccw(c74.493,85.739) 73.987,85.739 73.987,84.357 cw(c73.493,84.357) 73.493,83.863 ccw(c73.493,83.357) 72.987,83.357 72.987,61.366 ccw(c73.493,61.366) 73.493,60.859 95.993,60.859 cw(c95.993,57.866) 98.987,57.866 98.987,30.288 cw(c95.993,30.288) 95.993,27.295 53.898,27.295 53.892,27.288 53.892,23.138 53.898,23.131 55.303,23.131 cw(c55.303,21.138) 56.798,22.457 cw(c55.303,21.138) 57.297,21.138 57.297,2.993 cw(c54.303,2.993) 54.303,0 23.993,0 21.601,0.029 21.599,0.029 19.091,0.135 19.088,0.135 16.548,0.341 16.546,0.341 14.044,0.668 11.646,1.13 11.645,1.13 9.404,1.739 9.403,1.739 7.362,2.5 7.361,2.501 5.552,3.416 5.551,3.416 3.997,4.484 3.058,5.329 3.053,5.333
GND on Ref Top "TOP_REF_GND" (solid, remove dead copper, pour order 59): 2.263,6.26 1.592,7.24 1.053,8.278 0.639,9.366 0.639,9.367 0.341,10.497 0.147,11.659 0.044,12.843 0.043,12.844 0.013,14.038 0.013,119.565 0.043,120.758 0.044,120.759 0.147,121.942 0.147,121.943 0.341,123.105 0.341,123.106 0.639,124.235 0.639,124.237 1.053,125.324 1.592,126.362 2.263,127.342 3.067,128.257 3.07,128.26 4.011,129.105 5.564,130.172 5.566,130.173 7.374,131.089 7.375,131.089 9.416,131.85 14.057,132.921 14.058,132.922 16.559,133.248 16.561,133.248 19.103,133.454 21.612,133.56 21.613,133.56 24.006,133.589 54.316,133.589 cw(c54.316,130.596) 57.31,130.596 57.31,112.451 cw(c55.316,112.451) 56.811,111.133 cw(c55.316,112.451) 55.316,110.458 53.911,110.458 53.905,110.451 53.905,106.301 53.911,106.294 96.006,106.294 cw(c96.006,103.301) 99,103.301 99,86.87 cw(c96.006,86.87) 96.007,83.877 84.506,83.877 cw(c84.506,84.37) 84.013,84.37 84.013,85.752 ccw(c83.506,85.752) 83.506,86.259 74.506,86.259 ccw(c74.506,85.752) 74,85.752 74,84.37 cw(c73.506,84.37) 73.506,83.877 ccw(c73.506,83.37) 73,83.37 73,61.379 ccw(c73.506,61.379) 73.506,60.872 96.006,60.872 cw(c96.006,57.879) 99,57.879 99,30.301 cw(c96.006,30.301) 96.006,27.308 53.911,27.308 53.905,27.301 53.905,23.151 53.911,23.144 55.316,23.144 cw(c55.316,21.151) 56.811,22.47 cw(c55.316,21.151) 57.31,21.151 57.31,3.006 cw(c54.316,3.006) 54.316,0.013 24.006,0.013 21.614,0.042 21.612,0.042 19.104,0.148 19.101,0.148 16.561,0.354 16.559,0.354 14.058,0.681 14.057,0.681 11.659,1.143 11.658,1.143 9.417,1.752 9.416,1.752 7.375,2.513 7.374,2.514 5.565,3.429 5.565,3.43 4.011,4.497 3.071,5.342 3.066,5.346
GND on Ref Bot "BOT_REF_GND" (solid, remove dead copper, pour order 60): 2.263,6.26 1.592,7.24 1.053,8.278 0.639,9.366 0.639,9.367 0.341,10.497 0.147,11.659 0.044,12.843 0.043,12.844 0.013,14.038 0.013,119.565 0.043,120.758 0.044,120.759 0.147,121.942 0.147,121.943 0.341,123.105 0.341,123.106 0.639,124.235 0.639,124.237 1.053,125.324 1.592,126.362 2.263,127.342 3.067,128.257 3.07,128.26 4.011,129.105 5.564,130.172 5.566,130.173 7.374,131.089 7.375,131.089 9.416,131.85 14.057,132.921 14.058,132.922 16.559,133.248 16.561,133.248 19.103,133.454 21.612,133.56 21.613,133.56 24.006,133.589 54.316,133.589 cw(c54.316,130.596) 57.31,130.596 57.31,112.451 cw(c55.316,112.451) 56.811,111.133 cw(c55.316,112.451) 55.316,110.458 53.911,110.458 53.905,110.451 53.905,106.301 53.911,106.294 96.006,106.294 cw(c96.006,103.301) 99,103.301 99,86.87 cw(c96.006,86.87) 96.007,83.877 84.506,83.877 cw(c84.506,84.37) 84.013,84.37 84.013,85.752 ccw(c83.506,85.752) 83.506,86.259 74.506,86.259 ccw(c74.506,85.752) 74,85.752 74,84.37 cw(c73.506,84.37) 73.506,83.877 ccw(c73.506,83.37) 73,83.37 73,61.379 ccw(c73.506,61.379) 73.506,60.872 96.006,60.872 cw(c96.006,57.879) 99,57.879 99,30.301 cw(c96.006,30.301) 96.006,27.308 53.911,27.308 53.905,27.301 53.905,23.151 53.911,23.144 55.316,23.144 cw(c55.316,21.151) 56.811,22.47 cw(c55.316,21.151) 57.31,21.151 57.31,3.006 cw(c54.316,3.006) 54.316,0.013 24.006,0.013 21.614,0.042 21.612,0.042 19.104,0.148 19.101,0.148 16.561,0.354 16.559,0.354 14.058,0.681 14.057,0.681 11.659,1.143 11.658,1.143 9.417,1.752 9.416,1.752 7.375,2.513 7.374,2.514 5.565,3.429 5.565,3.43 4.011,4.497 3.071,5.342 3.066,5.346

## Other copper
Top Layer:
  pour cut-out: 91.855,47.53 91.855,46.54 85.5,46.54 85.5,47.53
  pour cut-out: 82.6,47.53 82.6,46.54 78.225,46.54 79.215,47.53
  pour cut-out: 48.65,71.3 50.5,71.3 50.5,65.2 48.65,65.2
  pour cut-out: 48.65,61.3 50.5,61.3 50.5,55.2 48.65,55.2
Ref Top:
  pour cut-out: 63.9,82.3 64.3,82.7 73,82.7 73,81.6 63.9,81.6
  pour cut-out: 51.6,49.3 53.8,47.1 96.4,47.1 96.4,48.1 54.3,48.1 52.4,50 52.4,79.3 54.7,81.6 60.2,81.6 60.6,82 60.6,82.7 54.1,82.7 51.6,80.2
Ref Bot:
  pour cut-out: 63.9,82.3 64.3,82.7 73,82.7 73,81.6 63.9,81.6
  pour cut-out: 51.6,49.3 53.8,47.1 96.4,47.1 96.4,48.1 54.3,48.1 52.4,50 52.4,79.3 54.7,81.6 60.2,81.6 60.6,82 60.6,82.7 54.1,82.7 51.6,80.2
Bottom Layer:
  pour cut-out: 50.9,75 53.4,77.5 59.7,77.5 60.6,78.4 60.6,79.5 52.2,79.5 48.6,75.9 48.6,48.6 50.7,46.5 96.4,46.5 96.4,48.1 52.1,48.1 50.9,49.3
  pour cut-out: 64.125,79.5 73.475,79.5 73.475,77.6 64.725,77.6 64.125,78.2

## Silkscreen, mask and mechanical layers (free items; w line width, h text height)
Top Overlay:
  drawing of 637 lines, arcs and shapes, not listed
  text "PA15" at 33.875,133.375 h1.7 r270
  text "PA11" at 45.017,133.375 h1.7 r270
  text "PB5" at 21.325,132.975 h1.52 r180
  text "SCL" at 27.5,132.512 h1.2 r180
  text "SDA" at 25.888,131.275 h1.2 r180
  text "SW2" at 51.25,130.909 h1.52 r180
  text "SW1" at 40.4,130.759 h1.52 r180
  text "BOOT" at 11.526,127.838 h1.52 r180
  text "+3,3В" at 3.22,123.43 h1.2
  text "+7,2В" at 3.225,120.53 h1.2
  text "RST" at 14.738,118.649 h1.6 r45
  text "STM RST" at 12.366,118.134 h1.3 r180
  text "+5В" at 3.22,117.63 h1.2
  text "DIO" at 14.932,116.311 h1.6 r45
  text "SWD" at 18.625,114.65 h1.6 r270
  text "GND" at 14.562,113.453 h1.6 r45
  text "RUN" at 0.875,113.195 h1.3
  text "CM5 RST" at 12.366,111.284 h1.3 r180
  text "CLK" at 14.583,111.217 h1.6 r45
  text "PWR" at 0.875,110.295 h1.3
  text "SWO" at 16.138,108.3 h1.2 r270
  text "PA5" at 7.487,107.32 h1.52
  text "+5В" at 22.175,105.463 h1.2 r270
  text "+7,2В" at 65.575,104.138 h1.6
  text "SRV X" at 69.225,104.138 h1.6
  text "+5В" at 73.188,104.138 h1.6
  text "GND" at 77.075,104.138 h1.6
  text "+7,2В" at 49.785,104.114 h1.2 r225
  text "M2A" at 9.237,103.975 h1.2
  text "M1A" at 14.1,102.937 h1.2
  text "+7,2В" at 65.575,102.5 h1.6
  text "SRV Y" at 69.25,102.5 h1.6
  text "LiDAR" at 73.175,102.5 h1.6
  text "GND" at 77.075,102.5 h1.6
  text "CHG LEVEL" at 4.026,102.162 h1.2
  text "M1B" at 14.1,101.412 h1.2
  text "САМ 0" at 87.018,100.9 h1.7 r270
  text "M2B" at 9.237,100.375 h1.2
  text "GND" at 71.5,99.396 h1.2 r270
  text "D0_N" at 72.5,99.396 h1.2 r270
  text "D0_P" at 73.5,99.396 h1.2 r270
  text "GND" at 74.5,99.396 h1.2 r270
  text "D1_N" at 75.5,99.396 h1.2 r270
  text "D1_P" at 76.5,99.396 h1.2 r270
  text "GND" at 77.5,99.396 h1.2 r270
  text "CLK_N" at 78.5,99.396 h1.2 r270
  text "CLK_P" at 79.5,99.393 h1.2 r270
  text "GND" at 80.5,99.396 h1.2 r270
  text "PWR-EN" at 81.5,99.396 h1.2 r270
  text "LED-EN" at 82.5,99.393 h1.2 r270
  text "SCL" at 83.5,99.396 h1.2 r270
  text "SDA" at 84.5,99.396 h1.2 r270
  text "+3,3V" at 85.5,99.396 h1.2 r270
  text "+5В" at 16.65,99.15 h1.2 r90
  text "GND" at 17.856,99.151 h1.2 r90
  text "FAN" at 10.607,94.775 h1.7 r90
  text "+7,2В" at 40.05,92.794 h3
  text "+5В" at 32.1,92.731 h3
  text "+3,3В" at 12.762,91.186 h1.2 r270
  text "LS R" at 6.475,90.72 h1.52
  text "TX" at 36.125,85.625 h1
  text "RX" at 38.175,85.625 h1
  text "CAM 0" at 38.563,80.672 h2 r270
  text "LiDAR" at 15.875,80.65 h2 r270
  text "X7" at 42.336,77.486 h1.7 r315
  text "GPIO8" at 19.282,76.986 h1.7 r315
  text "UART" at 21.136,76.986 h1.7 r315
  text "MIPI  / CSI 0" at 31.325,74.575 h1.7 r270
  text "MOTOR 1" at 52.121,73.35 h2 r270
  text "M1A" at 45.419,73.321 h1.2 r270
  text "M1A" at 50.563,73.325 h1.2 r270
  text "RPi CM5" at 24.696,72.425 h2 r270
  text "CAM 3" at 8.496,71.825 h2 r270
  text "+5В" at 45.419,71.321 h1.2 r270
  text "GND" at 50.563,71.325 h1.2 r270
  text "MIPI  / CSI 1" at 31.325,70.467 h1.7 r270
  text "SDA" at 45.419,69.321 h1.2 r270
  text "E1A" at 50.563,69.325 h1.2 r270
  text "USB" at 17.025,69.15 h1.7 r270
  text "E1B" at 50.563,67.325 h1.2 r270
  text "SCL" at 45.419,67.321 h1.2 r270
  text "M1B" at 45.419,65.321 h1.2 r270
  text "M1B" at 50.563,65.325 h1.2 r270
  text "CAM 1" at 38.613,63.422 h2 r270
  text "M2A" at 45.419,63.321 h1.2 r270
  text "M2A" at 50.563,63.325 h1.2 r270
  text "GPIO4 / GPIO5" at 28.745,63.175 h1.7 r270
  text "GPIO2 / GPIO3" at 22.545,63.15 h1.7 r270
  text "I2C 1" at 24.563,63.15 h1.7 r270
  text "RFL" at 45.419,61.321 h1.2 r270
  text "E2A" at 50.563,61.325 h1.2 r270
  text "MOTOR 2" at 52.146,59.675 h2 r270
  text "IMU" at 18.91,59.456 h2 r270
  text "E2B" at 50.563,59.325 h1.2 r270
  text "DP" at 45.419,59.321 h1.2 r270
  text "X8" at 38.404,58.269 h1.7 r270
  text "X10" at 93.975,57.942 h1.6
  text "UART" at 29.611,57.811 h1.7 r315
  text "DN" at 45.419,57.321 h1.2 r270
  text "M1A" at 50.563,57.325 h1.2 r270
  text "+7,2В" at 92.537,56.45 h1.6
  text "M2B" at 45.419,55.321 h1.2 r270
  text "M2B" at 50.563,55.325 h1.2 r270
  text "USART 1" at 31.833,55.125 h1.7 r270
  text "SERVO" at 92.537,54.985 h1.6
  text "INT: PA11" at 28.9,54.75 h1.7 r270
  text "FRONT:B6 / BACK:B7" at 36.2,54.6 h1.7 r270
  text "I2C 1" at 29.463,54 h1.7 r270
  text "LED" at 92.537,53.621 h1.6
  text "USB DP" at 92.537,52.257 h1.6
  text "CHG" at 83.875,51.592 h1.6
  text "+3S" at 73.625,51.271 h1.6
  text "BTN" at 78.8,51.271 h1.6
  text "GND" at 86.425,51.271 h1.6
  text "USB DN" at 92.537,50.876 h1.6
  text "+5В" at 92.537,49.504 h1.6
  text "LEDS" at 38.037,49.108 h1.7 r270
  text "SENS" at 16.175,48.257 h1.7 r270
  text "GND" at 92.537,48.131 h1.6
  text "R:B14 / L:B15 / REFL: / A3" at 18.6,47.95 h1.6 r270
  text "GND" at 92.537,46.75 h1.6
  text "STM32" at 31.446,46.55 h2 r270
  text "SERVOS" at 17.861,43.525 h1.7 r270
  text "X:A1 / Y:A2 / V:A0" at 19.725,42.975 h1.7 r270
  text "PB2 / PB10" at 40.681,41.626 h1.7 r270
  text "ENC1" at 43.44,41.607 h1.7 r270
  text "+3,3V" at 71.5,38.85 h1.2 r270
  text "SDA" at 72.5,38.85 h1.2 r270
  text "SCL" at 73.5,38.85 h1.2 r270
  text "LED-EN" at 74.5,38.85 h1.2 r270
  text "PWR-EN" at 75.5,38.85 h1.2 r270
  text "GND" at 76.5,38.85 h1.2 r270
  text "CLK_P" at 77.5,38.85 h1.2 r270
  text "CLK_N" at 78.5,38.85 h1.2 r270
  text "GND" at 79.5,38.85 h1.2 r270
  text "D1_P" at 80.5,38.85 h1.2 r270
  text "D1_N" at 81.5,38.85 h1.2 r270
  text "GND" at 82.5,38.85 h1.2 r270
  text "D0_P" at 83.5,38.85 h1.2 r270
  text "D0_N" at 84.5,38.85 h1.2 r270
  text "GND" at 85.5,38.85 h1.2 r270
  text "DRV1" at 35.308,37.275 h1.7 r270
  text "DRV2" at 28.558,37.201 h1.7 r270
  text "ENC2" at 17.383,37.126 h1.7 r270
  text "PB12 / PB13" at 20.444,37.126 h1.7 r270
  text "PA6 / PA7" at 32.55,37.05 h1.7 r270
  text "PB0 / PB1" at 25.8,36.976 h1.7 r270
  text "САМ 1" at 86.993,36.55 h1.7 r270
  text "M1" at 34.963,31.293 h1.7 r270
  text "M2" at 23.151,31.219 h1.7 r270
  text "RPI SYS" at 4.7,28.3 h1.7 r270
  text "EEPROM" at 6.568,28.275 h1.7 r270
  text "LS L" at 11.55,25.47 h1.52
  text "DBG USB" at 27.199,23.773 h1.52
  text "USB 3.0" at 37.302,23.773 h1.52
  text "EMMC" at 6.543,22.525 h1.7 r270
  text "USB N" at 20.775,21.375 h1.2
  text "TYPE-C" at 23.198,20.862 h1.52 r270
  text "PWR BTN" at 46.225,20.788 h2 r270
  text "WIFI" at 17.023,20.04 h1.52 r270
  text "SCL" at 9.821,19.425 h1.2 r270
  text "SCL" at 11.779,19.425 h1.2 r270
  text "GPIO 0" at 3.75,15.788 h1.2
  text "1,8В" at 14.875,15.788 h1.2
  text "USB P" at 20.775,15.275 h1.2
  text "SDA" at 9.821,14.2 h1.2 r270
  text "SDA" at 11.779,14.2 h1.2 r270
  text "GPIO 1" at 3.75,14.013 h1.2
  text "3,3В" at 14.875,14.013 h1.2
  text "GND" at 14.875,12.138 h1.2
  text "START" at 46.225,10.838 h2 r270
  text "CAM 0" at 9.992,10.2 h1.5 r270
  text "CAM 1" at 11.95,10.2 h1.5 r270
  text "VUSB" at 43.35,7.774 h1.2 r270
  text "<<<<" at 46.393,0.65 h3
Board Layer Stack Bottom Overlay:
  lines w0.15: 51.6,116.25 54.325,116.25 54.325,126.25 51.6,126.25 ; 51.6,116.25 51.6,126.25 ; 51.6,116.25 56.725,116.25 56.725,126.25 51.6,126.25 ; 51.6,116.25 51.6,126.25
  lines w2: 53.726,1.155 23.65,1.275 21.325,1.35 16.25,1.65 11.375,2.475 7.5,3.75 4.825,5.225 3.15,6.875 1.725,9.4 1.125,11.825 0.975,14.55 1.05,117.65 1,120.65 1.325,123.05 2.25,125.425 4.625,128.15 7.35,129.95 14.025,131.95 19.95,132.525 53.775,132.525
  text "SDA" at 54.325,123.725 h1.3
  text "SCL" at 54.325,121.325 h1.3
  text "+3,3В" at 54.325,118.625 h1.3
  text "CM5" at 50.298,116.389 h1.52 r270
  text "GND" at 54.325,116.25 h1.3
  text "STM32" at 44.298,115.763 h1.52 r270
Top Solder:
  region: 10.95,97.575 10.95,95.025 12.25,95.025 12.25,97.575
  rectangle: 11.1,107.625 13.45,108.925
  rectangle: 8.325,20.925 10.675,22.225
  rectangle: 8.3,23.475 10.65,24.775
  region: 47.727,120.171 47.727,121.096 44.827,121.096 44.827,120.171
  region: 48.753,124.111 47.828,124.111 47.828,121.211 48.753,121.211
  region: 44.82,125.126 44.82,124.201 47.72,124.201 47.72,125.126
  rectangle: 43.8,121.2 44.725,124.1
  rectangle: 43.65,43.675 44.5,63.6
  rectangle: 40.575,43.675 41.4,63.6
  rectangle: 9.625,43.675 10.45,63.6
  rectangle: 6.55,43.675 7.375,63.6
  rectangle: 71.3,32.804 86.7,34.204
  rectangle: 71.3,99.4 86.7,100.8
Board Layer Stack Bottom Solder:
  rectangle: 45.7,122.1 46.825,123.225
  rectangle: 56.375,54.475 60,58.125
  rectangle: 56.375,68.475 60,72.125
  rectangle: 27.1,121.575 30.3,124.75
  region: 11.225,97.705 11.225,95.33 12.525,95.33 12.525,97.705
  rectangle: 11.075,107.625 13.45,108.925
  rectangle: 8.3,20.925 10.675,22.225
  rectangle: 8.275,23.475 10.65,24.775
  rectangle: 71.525,99.621 86.475,100.571
  rectangle: 71.525,33.025 86.475,33.975
Mechanical 1:
  lines w0.013: 53.911,23.151 55.316,23.151 ; 53.911,23.151 53.911,27.301 96.006,27.301 ccw(c96.006,30.301) 99.006,30.301 99.006,32.881 ccw(c98.006,32.881) 98.006,33.881 91.756,33.881 91.756,46.131 98.006,46.131 ccw(c98.006,47.131) 99.006,47.131 99.006,57.879 ccw(c96.006,57.879) 96.006,60.879 73.506,60.879 cw(c73.506,61.379) 73.006,61.379 73.006,83.37 cw(c73.506,83.37) 73.506,83.87 ccw(c73.506,84.37) 74.006,84.37 74.006,85.752 cw(c74.506,85.752) 74.506,86.252 83.506,86.252 cw(c83.506,85.752) 84.006,85.752 84.006,84.37 ccw(c84.506,84.37) 84.506,83.87 96.006,83.87 ccw(c96.006,86.87) 99.006,86.87 99.006,103.301 ccw(c96.006,103.301) 96.006,106.301 53.911,106.301 53.911,110.451 ; 53.911,23.151 55.316,23.151 ; 53.911,110.451 55.316,110.451 ; 53.911,110.451 55.316,110.451 ; 54.316,133.596 cw(c54.316,130.596) 57.316,130.596 ; 54.316,133.596 cw(c54.316,130.596) 57.316,130.596 ; 54.316,133.596 24.006,133.596 21.613,133.567 19.102,133.461 16.559,133.255 14.056,132.928 11.657,132.466 9.414,131.857 7.372,131.095 5.561,130.179 4.006,129.111 3.064,128.263 1.586,126.366 1.047,125.327 0.633,124.238 0.334,123.107 0.141,121.944 0.037,120.759 0.006,119.565 0.006,14.037 0.037,12.843 0.141,11.659 0.334,10.495 0.633,9.364 1.047,8.275 1.586,7.237 2.257,6.256 3.064,5.339 4.006,4.492 5.561,3.423 7.372,2.507 9.414,1.746 11.657,1.137 14.056,0.674 16.559,0.347 19.102,0.141 21.613,0.035 24.006,0.006 54.316,0.006 ccw(c54.316,3.006) 57.316,3.006 ; 55.316,23.151 cw(c55.316,21.151) 57.316,21.151 ; 55.316,110.451 ccw(c55.316,112.451) 57.316,112.451 ; 55.316,110.451 ccw(c55.316,112.451) 57.316,112.451 ; 57.316,3.006 57.316,21.151 ; 57.316,3.006 57.316,21.151 ; 57.316,112.451 57.316,130.596 ; 57.316,112.451 57.316,130.596
Mechanical 2:
  drawing of 2179 lines, arcs and shapes, not listed
Mechanical 13:
  circle w0.013: c46.116,119.348 r2.1
  circle w0.013: c46.116,14.254 r2.1
  lines w0.5: 0.006,14.037 0.006,119.565 0.037,120.759 0.141,121.944 0.334,123.107 0.633,124.238 1.047,125.327 1.586,126.366 3.064,128.263 4.006,129.111 5.561,130.179 7.372,131.095 9.414,131.857 11.657,132.466 14.056,132.928 16.559,133.255 19.102,133.461 21.613,133.567 24.006,133.596 54.316,133.596 cw(c54.316,130.596) 57.316,130.596 57.316,112.451 cw(c55.316,112.451) 55.316,110.451 53.911,110.451 53.911,106.301 96.006,106.301 cw(c96.006,103.301) 99.006,103.301 99.006,86.87 cw(c96.006,86.87) 96.006,83.87 84.506,83.87 cw(c84.506,84.37) 84.006,84.37 84.006,85.752 ccw(c83.506,85.752) 83.506,86.252 74.506,86.252 ccw(c74.506,85.752) 74.006,85.752 74.006,84.37 cw(c73.506,84.37) 73.506,83.87 ccw(c73.506,83.37) 73.006,83.37 73.006,61.379 ccw(c73.506,61.379) 73.506,60.879 96.006,60.879 cw(c96.006,57.879) 99.006,57.879 99.006,30.301 cw(c96.006,30.301) 96.006,27.301 53.911,27.301 53.911,23.151 55.316,23.151 55.37,23.151 cw(c55.37,21.27) 56.7,22.6 56.728,22.572 cw(c55.306,21.151) 57.316,21.151 57.316,3.006 cw(c54.443,3.006) 56.475,0.975 56.348,0.848 cw(c54.316,2.879) 54.316,0.006 24.006,0.006 21.613,0.035 19.102,0.141 16.559,0.347 14.056,0.674 11.657,1.137 9.414,1.746 7.372,2.507 5.561,3.423 4.006,4.492 3.064,5.339 2.257,6.256 1.586,7.237 1.047,8.275 0.633,9.364 0.334,10.495 0.141,11.659 0.037,12.843 0.006,14.037